# Altium PCB board_pls.PcbDoc
Units mil, origin at the board's own origin, x right, y up, seen from the top; angles counter-clockwise.
Board outline 8000 x 8000 mil, 4 copper layers (LV, GND, LOOP, HV), stack 53.912 mil thick; 78 components, 25 nets, 206 pads, 75 vias.
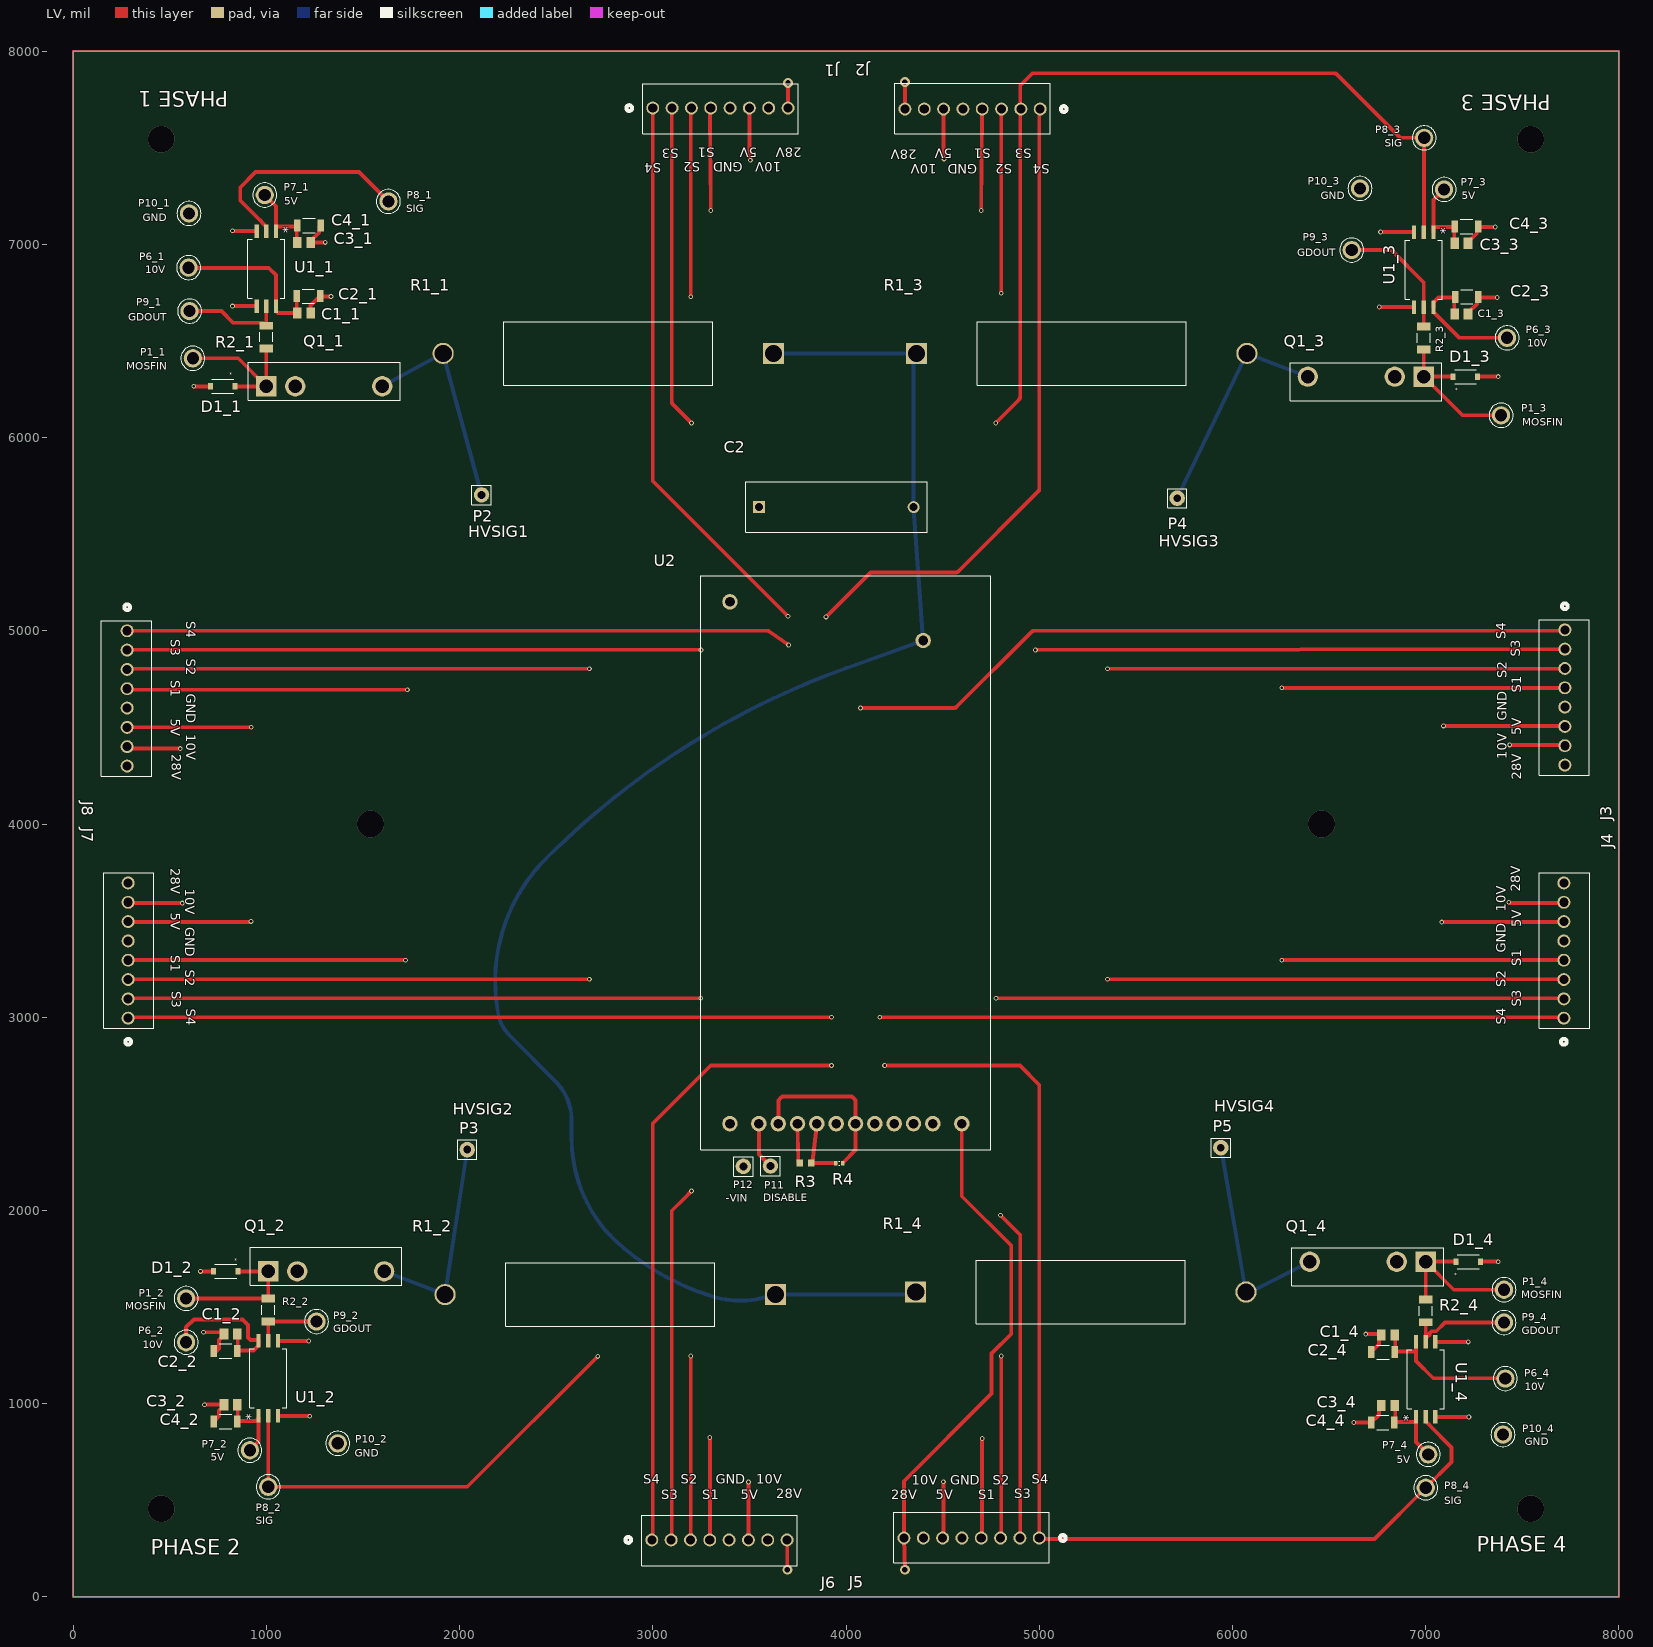
[diagram p0: LV view]
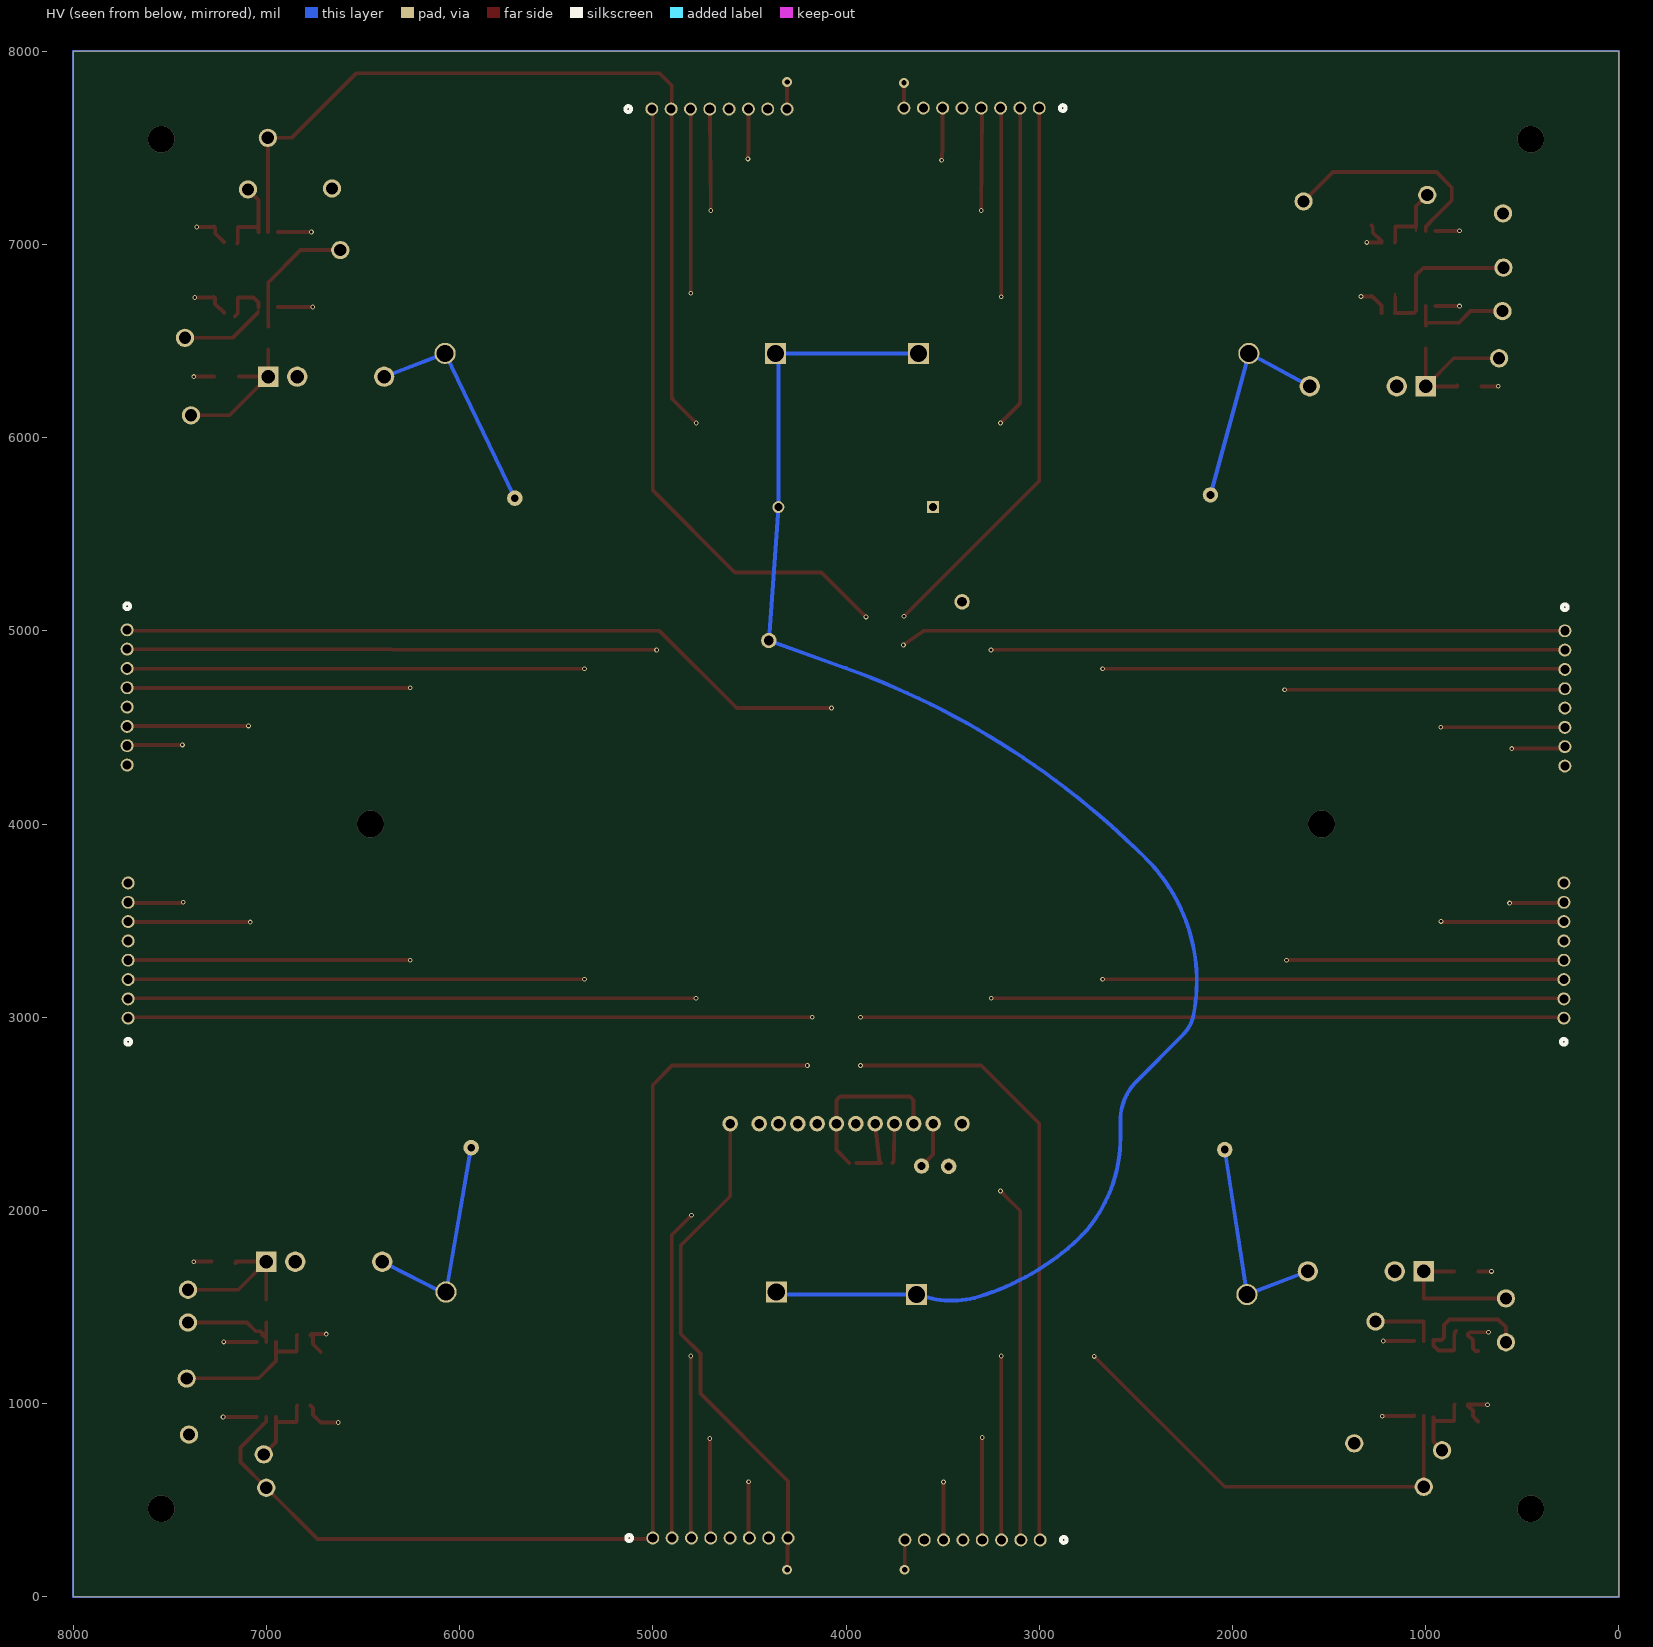
[diagram p1: HV view, seen from below]
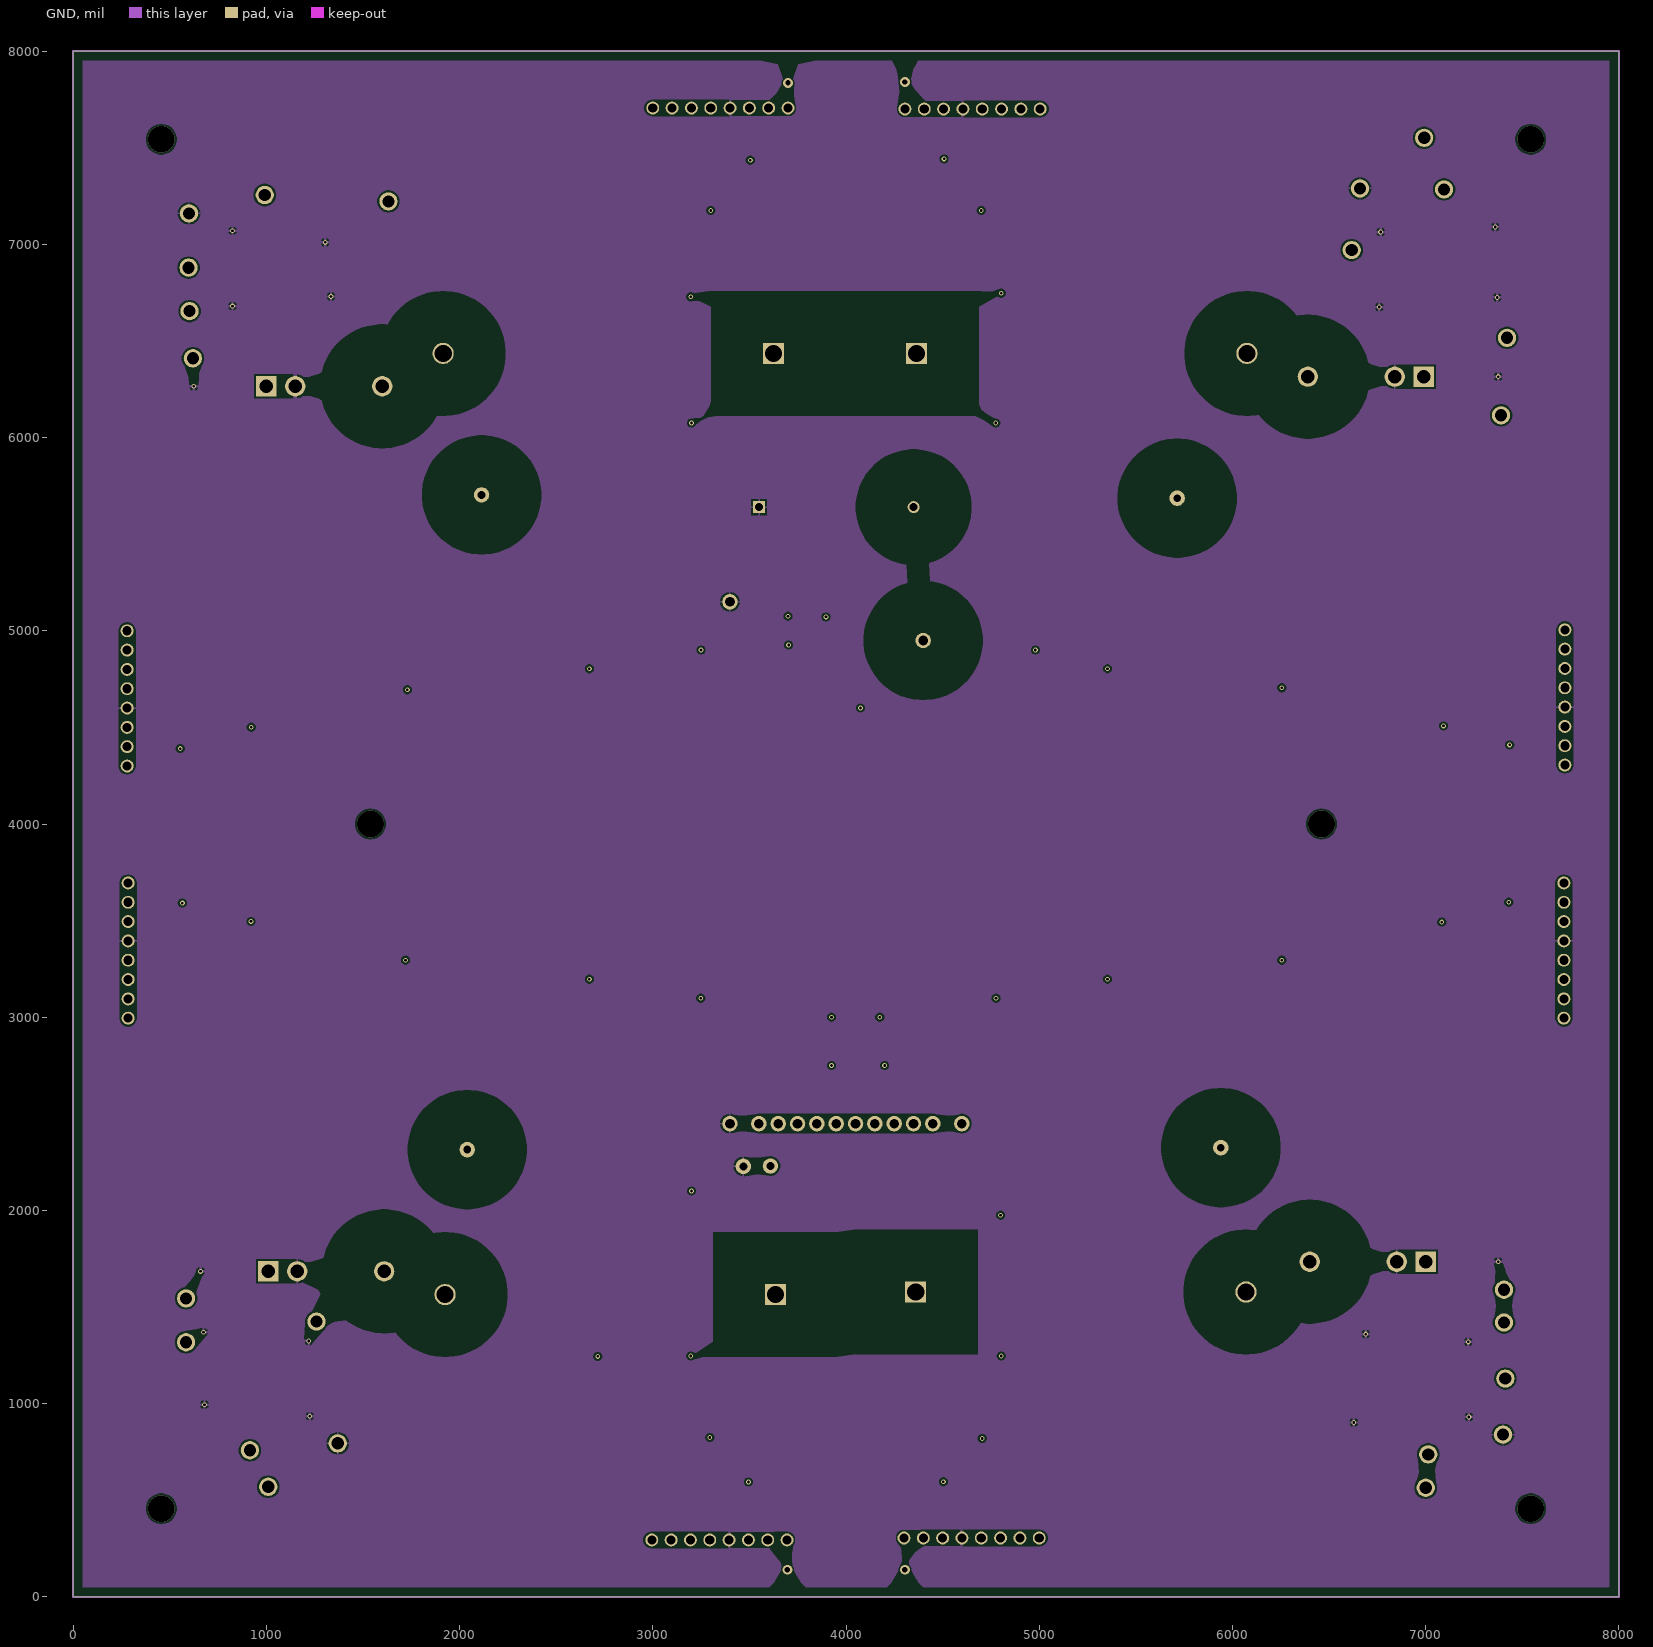
[diagram p2: GND]
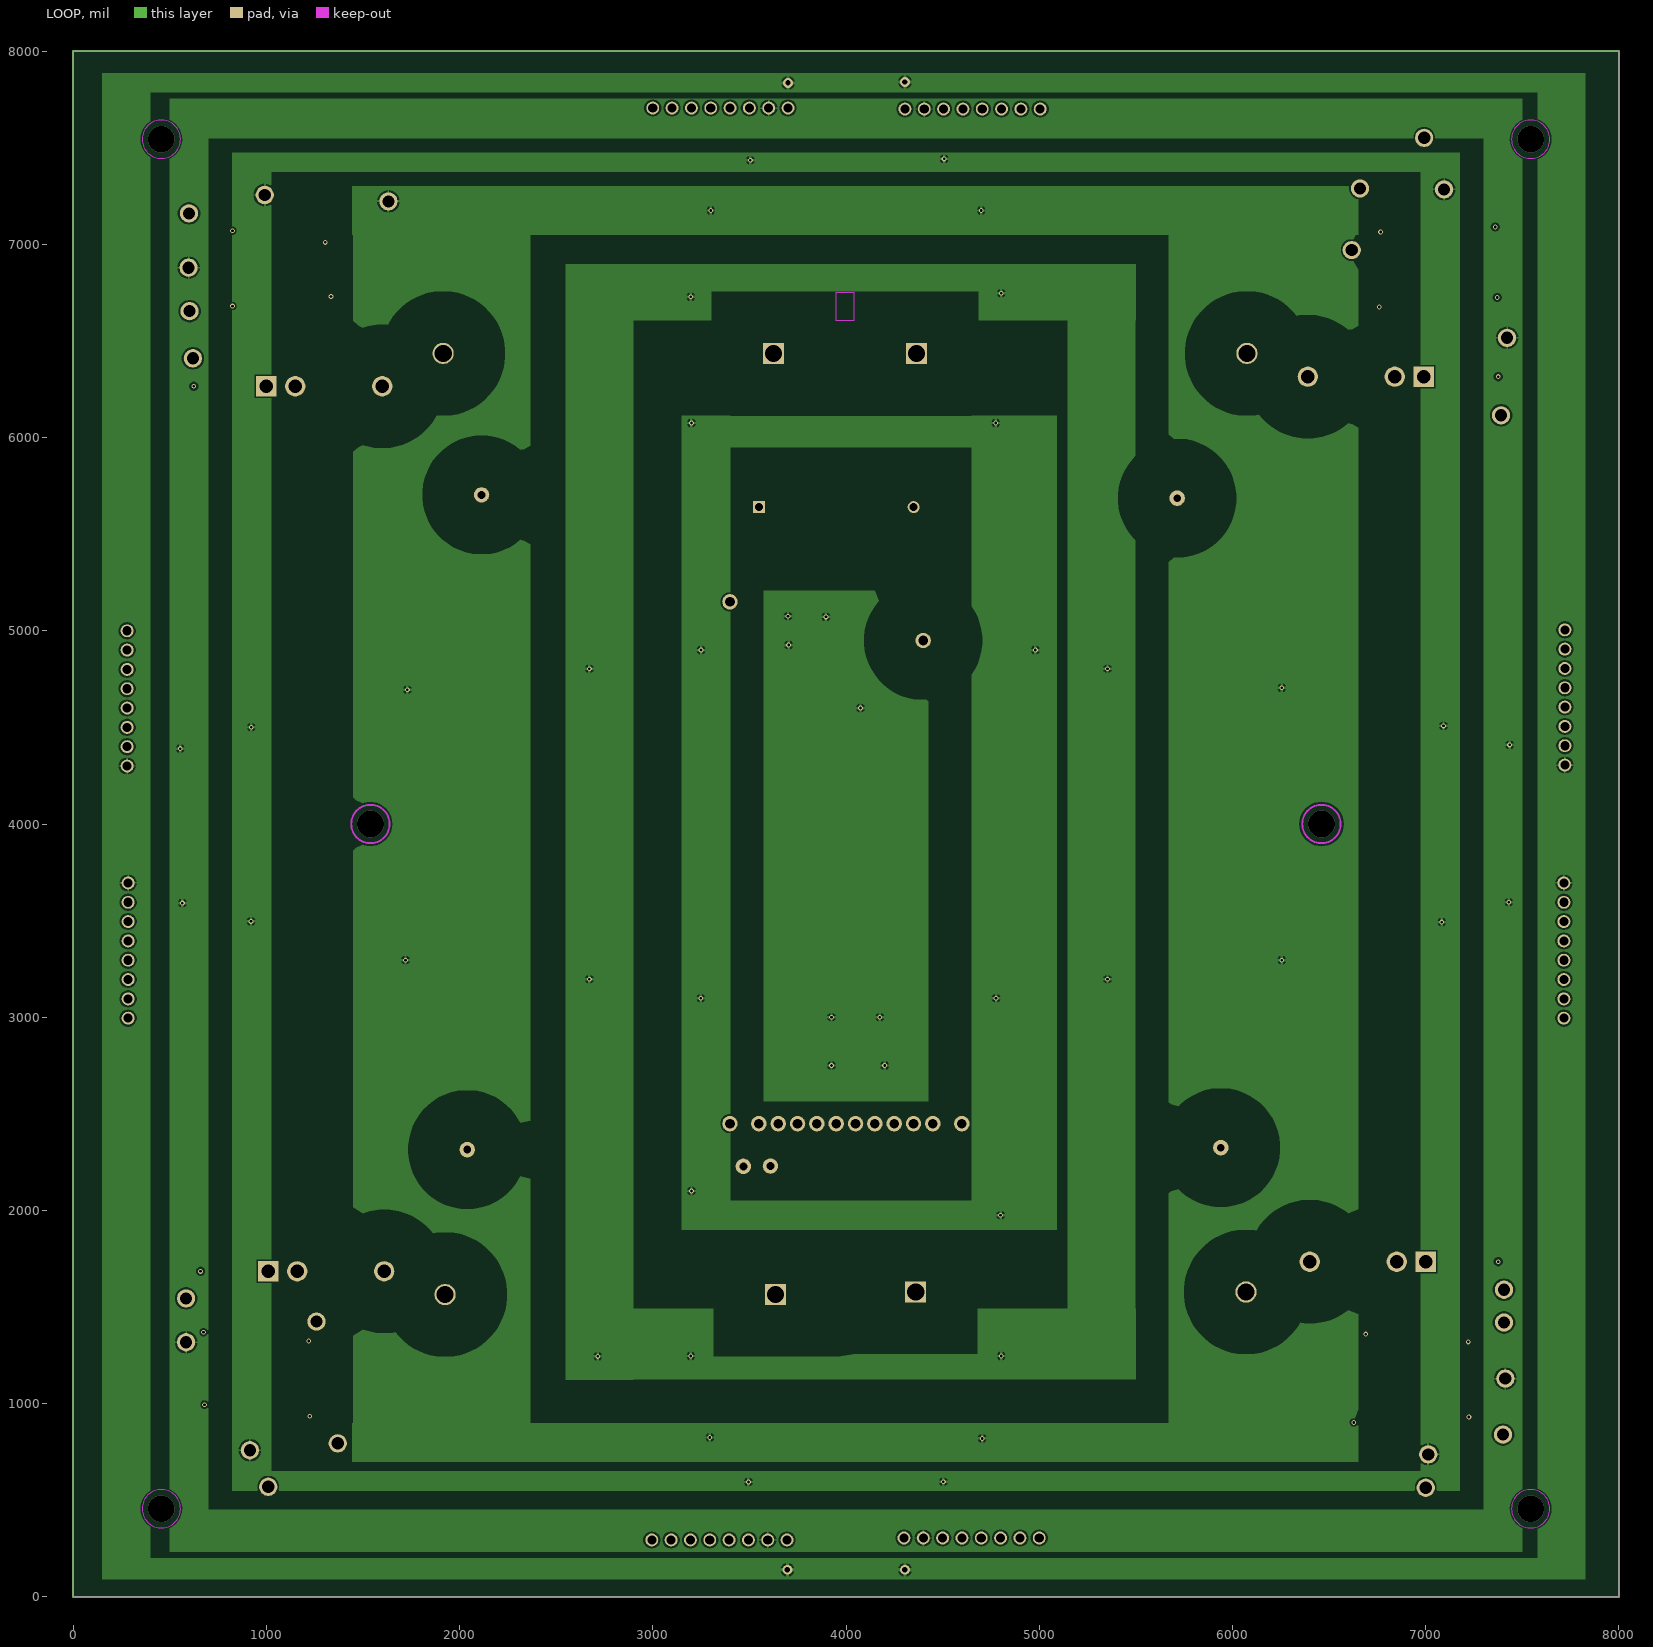
[diagram p3: LOOP]

## Layer stack, top to bottom
Top Solder: solder mask 1, SM-001, Dk 4
LV: signal copper 1.378
Dielectric 1: prepreg 5.1, PP-017, Dk 4.3
Dielectric 2: prepreg 5.1, PP-017, Dk 4.3
GND: signal copper 1.378
Dielectric 3: core 28, Core-039, Dk 4.8
LOOP: signal copper 1.378
Dielectric 4: prepreg 5.1, PP-017, Dk 4.3
Dielectric 5: prepreg 5.1, PP-017, Dk 4.3
HV: signal copper 1.378
Bottom Solder: solder mask 1, SM-001, Dk 4

## Board outline
0,0 0,8000 8000,8000 8000,0

## Design rules (kind name [scope] priority, off if disabled: settings)
Clearance "Schematic Clearance Constraint_4" [InNet('HVSIG3')] p1: gap=267.72 ignorepadtopadclearanceinfootprint=TRUE except(0: Arc-Hole Track-Hole SMDPad-Hole THPad-Hole Via-Hole Fill-Hole Poly-Hole Region-Hole Text-Hole; 10: Arc-Text Track-Text SMDPad-Text THPad-Text Via-Text Fill-Text Poly-Text Region-Text Text-Text; 196.85: Arc-Arc Arc-Track Arc-SMDPad Arc-THPad Arc-Via Track-Track Track-SMDPad Track-THPad Track-Via SMDPad-SMDPad SMDPad-THPad SMDPad-Via THPad-THPad THPad-Via Via-Via)
Clearance "Schematic Clearance Constraint_3" [InNet('HVSIG1')] p2: gap=267.72 ignorepadtopadclearanceinfootprint=TRUE except(0: Arc-Hole Track-Hole SMDPad-Hole THPad-Hole Via-Hole Fill-Hole Poly-Hole Region-Hole Text-Hole; 10: Arc-Text Track-Text SMDPad-Text THPad-Text Via-Text Fill-Text Poly-Text Region-Text Text-Text; 196.85: Arc-Arc Arc-Track Arc-SMDPad Arc-THPad Arc-Via Track-Track Track-SMDPad Track-THPad Track-Via SMDPad-SMDPad SMDPad-THPad SMDPad-Via THPad-THPad THPad-Via Via-Via)
Clearance "Schematic Clearance Constraint_2" [InNet('HVSIG4')] p3: gap=267.72 ignorepadtopadclearanceinfootprint=TRUE except(0: Arc-Hole Track-Hole SMDPad-Hole THPad-Hole Via-Hole Fill-Hole Poly-Hole Region-Hole Text-Hole; 10: Arc-Text Track-Text SMDPad-Text THPad-Text Via-Text Fill-Text Poly-Text Region-Text Text-Text; 196.85: Arc-Arc Arc-Track Arc-SMDPad Arc-THPad Arc-Via Track-Track Track-SMDPad Track-THPad Track-Via SMDPad-SMDPad SMDPad-THPad SMDPad-Via THPad-THPad THPad-Via Via-Via)
Clearance "Schematic Clearance Constraint_1" [InNet('3kV')] p4: gap=267.72 ignorepadtopadclearanceinfootprint=TRUE except(0: Arc-Hole Track-Hole SMDPad-Hole THPad-Hole Via-Hole Fill-Hole Poly-Hole Region-Hole Text-Hole; 10: Arc-Text Track-Text SMDPad-Text THPad-Text Via-Text Fill-Text Poly-Text Region-Text Text-Text; 196.85: Arc-Arc Arc-Track Arc-SMDPad Arc-THPad Arc-Via Track-Track Track-SMDPad Track-THPad Track-Via SMDPad-SMDPad SMDPad-THPad SMDPad-Via THPad-THPad THPad-Via Via-Via)
Clearance "Schematic Clearance Constraint" [InNet('HVSIG2')] p5: gap=267.72 ignorepadtopadclearanceinfootprint=TRUE except(0: Arc-Hole Track-Hole SMDPad-Hole THPad-Hole Via-Hole Fill-Hole Poly-Hole Region-Hole Text-Hole; 10: Arc-Text Track-Text SMDPad-Text THPad-Text Via-Text Fill-Text Poly-Text Region-Text Text-Text; 196.85: Arc-Arc Arc-Track Arc-SMDPad Arc-THPad Arc-Via Track-Track Track-SMDPad Track-THPad Track-Via SMDPad-SMDPad SMDPad-THPad SMDPad-Via THPad-THPad THPad-Via Via-Via)
Clearance [All] p6: gap=10 ignorepadtopadclearanceinfootprint=FALSE except(0: Arc-Hole Track-Hole SMDPad-Hole THPad-Hole Via-Hole Fill-Hole Poly-Hole Region-Hole Text-Hole)
Height [All] p1 off: minheight=0 maxheight=1000 prefheight=500
HoleSize [All] p1 off: absolutevalues=TRUE maxlimit=100 minlimit=1 maxpercent=80.000 minpercent=20.000
PolygonConnect [All] p1: connectstyle=Relief reliefconductorwidth=10 reliefentries=4 polygonreliefangle="90 Angle" airgapwidth=10
RoomDefinition U4_power [InComponentClass('U4_power')] p1: confinementstyle=ConfineIn formatcopy=TRUE lockcomponents=FALSE outline 4175,485 7667,485 7667,1865 4175,1865
RoomDefinition U3_power [InComponentClass('U3_power')] p2: confinementstyle=ConfineIn formatcopy=FALSE lockcomponents=FALSE outline 4175,6025 7656,6025 7656,7636 4175,7636
RoomDefinition top_pls [InComponentClass('top_pls')] p3: confinementstyle=ConfineIn formatcopy=TRUE lockcomponents=FALSE outline 10,2823.64 10,5166.36 2822.46,7970 5172.54,7970 7985,5166.36 7985,2823.64 5172.54,20 2822.46,20
RoomDefinition U1_power [InComponentClass('U1_power')] p4: confinementstyle=ConfineIn formatcopy=TRUE lockcomponents=FALSE outline 3825,7515 515,7515 515,6135 3825,6135
RoomDefinition U2_power [InComponentClass('U2_power')] p5: confinementstyle=ConfineIn formatcopy=FALSE lockcomponents=FALSE outline 3825,1865 485,1865 485,485 3825,485
RoutingVias [All] p1: holewidth=28 width=50 viastyle="Through Hole" minholewidth=28 minwidth=50 maxholewidth=28 maxwidth=50
SolderMaskExpansion [All] p1: expansion=4 istentingtop=FALSE
Width [All] p1 off: maxlimit=10 minlimit=10 preferedwidth=10
28 further rules are at their usual default settings.

## Classes and differential pairs
channel class power_pls: U1_power U2_power U3_power U4_power
component class U4_power: C1_4 C2_4 C3_4 C4_4 D1_4 P1_4 P6_4 P7_4 P8_4 P9_4 P10_4 Q1_4 R1_4 R2_4 U1_4
component class U3_power: C1_3 C2_3 C3_3 C4_3 D1_3 P1_3 P6_3 P7_3 P8_3 P9_3 P10_3 Q1_3 R1_3 R2_3 U1_3
component class U2_power: C1_2 C2_2 C3_2 C4_2 D1_2 P1_2 P6_2 P7_2 P8_2 P9_2 P10_2 Q1_2 R1_2 R2_2 U1_2
component class U1_power: C1_1 C2_1 C3_1 C4_1 D1_1 P1_1 P6_1 P7_1 P8_1 P9_1 P10_1 Q1_1 R1_1 R2_1 U1_1
component class top_pls: C2 J1 J2 J3 J4 J5 J6 J7 J8 P2 P3 P4 P5 P11 P12 R3 R4 U2

## Components (designator, comment, footprint, x,y, rotation, side; value= is the part's Value field where it differs from the comment)
C1_1 "0.1u" "0.1UF CER SMD" 1195,6645 r180 top (schematic designator C1)
C1_2 "0.1u" "0.1UF CER SMD" 815,1360 r0 top (schematic designator C1)
C1_3 "0.1u" "0.1UF CER SMD" 7185,6640 r180 top (schematic designator C1)
C1_4 "0.1u" "0.1UF CER SMD" 6805,1355 r0 top (schematic designator C1)
C2 "27n" "HV CAPACITOR" 3550,5640 r0 top
C2_1 "10u" "10UF CER SMD" 1218,6732 r180 top (schematic designator C2)
C2_2 "10u" "10UF CER SMD" 789,1273 r0 top (schematic designator C2)
C2_3 "10u" "10UF CER SMD" 7212,6728 r180 top (schematic designator C2)
C2_4 "10u" "10UF CER SMD" 6779,1267 r0 top (schematic designator C2)
C3_1 "0.1u" "0.1UF CER SMD" 1195,7010 r180 top (schematic designator C3)
C3_2 "0.1u" "0.1UF CER SMD" 815,995 r0 top (schematic designator C3)
C3_3 "0.1u" "0.1UF CER SMD" 7185,7005 r180 top (schematic designator C3)
C3_4 "0.1u" "0.1UF CER SMD" 6805,990 r0 top (schematic designator C3)
C4_1 "10u" "10UF CER SMD" 1221,7097 r180 top (schematic designator C4)
C4_2 "10u" "10UF CER SMD" 789,908 r0 top (schematic designator C4)
C4_3 "10u" "10UF CER SMD" 7211,7092 r180 top (schematic designator C4)
C4_4 "10u" "10UF CER SMD" 6778,903 r0 top (schematic designator C4)
D1_1 "Zener Diode" "ZENER DIODE" 775,6265 r180 top (schematic designator D1)
D1_2 "Zener Diode" "ZENER DIODE" 790,1685 r180 top (schematic designator D1)
D1_3 "Zener Diode" "ZENER DIODE" 7205,6315 r0 top (schematic designator D1)
D1_4 "Zener Diode" "ZENER DIODE" 7220,1735 r0 top (schematic designator D1)
J1 "207843-0008" "1X8 MOLEX HEADER - FEMALE" 3000,7705 r0 top
J2 "207843-0008" "1X8 MOLEX HEADER - FEMALE" 5005,7700 r180 top
J3 "207843-0008" "1X8 MOLEX HEADER - FEMALE" 7720,5005 r270 top
J4 "207843-0008" "1X8 MOLEX HEADER - FEMALE" 7715,2995 r90 top
J5 "207843-0008" "1X8 MOLEX HEADER - FEMALE" 5000,305 r180 top
J6 "207843-0008" "1X8 MOLEX HEADER - FEMALE" 2995,295 r0 top
J7 "207843-0008" "1X8 MOLEX HEADER - FEMALE" 285,2995 r90 top
J8 "207843-0008" "1X8 MOLEX HEADER - FEMALE" 280,5000 r270 top
P1_1 "MOSFIN" 5013 620,6410 r0 top (schematic designator P1)
P1_2 "MOSFIN" 5013 585,1545 r90 top (schematic designator P1)
P1_3 "MOSFIN" 5013 7390,6115 r90 top (schematic designator P1)
P1_4 "MOSFIN" 5013 7405,1590 r90 top (schematic designator P1)
P2 "HVSIG1" VIA 2114,5703 r0 top
P3 "HVSIG2" VIA 2040,2315 r0 top
P4 "HVSIG3" VIA 5714,5686 r0 top
P5 "HVSIG4" VIA 5940,2325 r0 top
P6_1 "10V" 5013 598,6879 r90 top (schematic designator P6)
P6_2 "10V" 5013 585,1318 r270 top (schematic designator P6)
P6_3 "10V" 5013 7421,6516 r90 top (schematic designator P6)
P6_4 "10V" 5013 7412,1130 r270 top (schematic designator P6)
P7_1 "5V" 5013 992,7255 r90 top (schematic designator P7)
P7_2 "5V" 5013 915,759 r270 top (schematic designator P7)
P7_3 "5V" 5013 7095,7284 r90 top (schematic designator P7)
P7_4 "5V" 5013 7013,738 r270 top (schematic designator P7)
P8_1 "SIG" 5013 1632,7222 r90 top (schematic designator P8)
P8_2 "SIG" 5013 1010,570 r270 top (schematic designator P8)
P8_3 "SIG" 5013 6992,7551 r90 top (schematic designator P8)
P8_4 "SIG" 5013 7000,565 r270 top (schematic designator P8)
P9_1 "GDOUT" 5013 603,6654 r90 top (schematic designator P9)
P9_2 "GDOUT" 5013 1260,1425 r270 top (schematic designator P9)
P9_3 "GDOUT" 5013 6617,6970 r90 top (schematic designator P9)
P9_4 "GDOUT" 5013 7405,1420 r270 top (schematic designator P9)
P10_1 "GND" 5013 600,7160 r90 top (schematic designator P10)
P10_2 "GND" 5013 1370,795 r270 top (schematic designator P10)
P10_3 "GND" 5013 6660,7289 r90 top (schematic designator P10)
P10_4 "GND" 5013 7400,840 r270 top (schematic designator P10)
P11 "DISABLE" Via 3609,2230 r0 top
P12 "-VIN" Via 3469,2228 r0 top
Q1_1 "MOSFET" MOSFET 1000,6265 r0 top (schematic designator Q1)
Q1_2 "MOSFET" MOSFET 1010,1685 r0 top (schematic designator Q1)
Q1_3 "MOSFET" MOSFET 6990,6315 r180 top (schematic designator Q1)
Q1_4 "MOSFET" MOSFET 7000,1735 r180 top (schematic designator Q1)
R1_1 "10M" "10M OHM" 3625,6435 r180 top (schematic designator R1)
R1_2 "10M" "10M OHM" 3635,1565 r180 top (schematic designator R1)
R1_3 "10M" "10M OHM" 4365,6435 r0 top (schematic designator R1)
R1_4 "10M" "10M OHM" 4360,1578 r0 top (schematic designator R1)
R2_1 "4.99" "4.99 OHM" 1000,6520 r90 top (schematic designator R2)
R2_2 "4.99" "4.99 OHM" 1010,1485 r270 top (schematic designator R2)
R2_3 "4.99" "4.99 OHM" 6990,6515 r90 top (schematic designator R2)
R2_4 "4.99" "4.99 OHM" 7000,1480 r270 top (schematic designator R2)
R3 "330" "330 OHM" 3790,2245 r0 top
R4 "180" "180 OHM" 3965,2245 r0 top
U1_1 "Gate Driver" "GATE DRIVER" 1000,6874.13 r270 top (schematic designator U1)
U1_2 "Gate Driver" "GATE DRIVER" 1010,1130.87 r90 top (schematic designator U1)
U1_3 "Gate Driver" "GATE DRIVER" 6990,6869.13 r270 top (schematic designator U1)
U1_4 "Gate Driver" "GATE DRIVER" 7000,1125.87 r90 top (schematic designator U1)
U2 "Step Up Converter" "STEP UP CONVERTER" 4000,3800 r90 top

## Footprints (in the part's own frame and the unit in brackets; to place one, negate y for a bottom-side part, rotate by r counter-clockwise, add the part's x,y. Pads: shape width x height; smd on the part's side, far side on the other; paste and mask are expansions set on the pad)
"0.1UF CER SMD" [mm] "CAPC2012X94N"
  rect 1.16x1.47 smd: 1(-0.88,0) 2(0.88,0)
  body extent -1,-0.63 1,0.63, height 0.94
"1X8 MOLEX HEADER - FEMALE" [mil] "CONN_171856-0008_MOL"
  round 67 hole 47 mask+0: 1(0,0) 2(100,0) 3(200,0) 4(300,0) 5(400,0) 6(500,0) 7(600,0) 8(700,0)
  silkscreen extent -137,-133 752,127, body extent 0,0 10,10, height 10
"4.99 OHM" [mm] "RESC3116X65N"
  rect 1.05x1.77 smd: 1(-1.485,0) 2(1.485,0)
  silkscreen extent -0.64,-0.88 0.64,0.88, body extent -1.6,-0.8 1.6,0.8, height 0.65
"10M OHM" [mil] "OH_MOX910_OHM"
  rect 110x110 hole 90 mask+0: 1(0,0)
  round 110 hole 90 mask+0: 2(1710,0)
  silkscreen extent 315,-165 1395,165, body extent 0,0 10,10, height 10
"10UF CER SMD" [mm] "CAP_CL31_SAM"
  rect 0.856x1.6 smd paste+0 mask+0: 1(-1.528,0) 2(1.528,0)
  silkscreen extent -0.79,-0.93 0.79,0.93, body extent 0,0 0.25,0.25, height 0.25
"180 OHM" [mm] "RESC1005X40N"
  rect 0.5x0.6 smd: 1(-0.455,0) 2(0.455,0)
  silkscreen extent -0.05,-0.25 0.05,0.25
"330 OHM" [mm] "RESC1508X55N"
  rect 0.87x0.93 smd: 1(-0.755,0) 2(0.755,0)
5013 [mm] "TESTPOINT_5013"
  round 2.4 hole 1.6: 1(0,0)
  silkscreen extent -1.59,-1.58 1.59,1.58
"GATE DRIVER" [mil] "ADuM4120"
  rect 69.53x22.08 smd paste+0 mask+0: 1(-194.13,50) 2(-194.13,0) 3(-194.13,-50) 4(194.13,-50) 5(194.13,0) 6(194.13,50)
  silkscreen extent -153,-95 153,95, body extent 0,0 10,10, height 10
"HV CAPACITOR" [mil] "SV17_AVX"
  rect 62x62 hole 42 mask+0: 1(0,0)
  round 62 hole 42 mask+0: 2(800,0)
  silkscreen extent -70,-130 870,130, body extent 0,0 10,10, height 10
MOSFET [mm]
  rect 2.67x2.67 hole 1.78: 1(0,0)
  round 2.67 hole 1.78: 2(3.81,0) 3(15.24,0)
  silkscreen extent -2.34,-1.85 17.58,3.17, body extent -2.34,-1.85 17.58,3.17, height 26.52
"STEP UP CONVERTER" [mil] "HRL30"
  round 80 hole 50: 1(-1350.43,600.7) 2(-1350.43,450.7) 3(-1350.43,350.7) 4(-1350.43,250.7) 5(-1350.43,150.7) 6(-1350.43,50.7) 7(-1350.43,-49.3) 8(-1350.43,-149.3) 9(-1350.43,-249.3) 10(-1350.43,-349.3) 11(-1350.43,-449.3) 12(-1350.43,-599.3) 13(1149.57,-399.3) 14(1349.57,600.7)
  silkscreen extent -1485,-749 1485,751
VIA [mil]
  round 80 hole 40: 1(0,0)
  silkscreen extent -50,-50 50,50
Via [mil]
  round 80 hole 40: 1(0,0)
  silkscreen extent -50,-50 50,50
"ZENER DIODE" [mil] "KDZVTR16B"
  rect 26x35 smd paste+0 mask+0: 1(-64,0) 2(64,0)
  silkscreen extent -56,-37 56,37, body extent 0,0 10,10, height 10

## Part data
C1_1 C1_2 C1_3 C1_4 C2 C2_1 C2_2 C2_3 C2_4 C3_1 C3_2 C3_3 C3_4 C4_1 C4_2 C4_3 C4_4: library part Capacitor
D1_1 D1_2 D1_3 D1_4: "KDZVTR16B", Built_By=EMA_Matt, Copyright="Copyright (C) 2018 Accelerated Designs. All rights reserved", Manufacturer_Part_Number=KDZVTR16B, RefDes=RefDes, SourceLibrary=Rohm_2019-09-23, Type=DEV, Vendor="ROHM Semiconductor"
J1 J2 J3 J4 J5 J6 J7 J8: "1x8 Header", Manufacturer_Name=Molex, Mouser Part Number=538-207843-0008, Datasheet Link=https://www.molex.com/pdm_docs/sd/2078430008_sd.pdf, Height=6.95mm, Manufacturer_Part_Number=207843-0008, Mouser Price/Stock=https://www.mouser.co.uk/ProductDetail/Molex/207843-0008?qs=XeJtXLiO41QJV3n1oae5pg%3D%3D
P1_1 P1_2 P1_3 P1_4 P2 P3 P4 P5 P6_1 P6_2 P6_3 P6_4 P7_1 P7_2 P7_3 P7_4 P8_1 P8_2 P8_3 P8_4 P9_1 P9_2 P9_3 P9_4 P10_1 P10_2 P10_3 P10_4 P11 P12: library part "Output Point", "Thru hole via"
Q1_1 Q1_2 Q1_3 Q1_4: "IXTL2N4X0"
R1_1 R1_2 R1_3 R1_4 R2_1 R2_2 R2_3 R2_4 R3 R4: library part Resistor
U1_1 U1_2 U1_3 U1_4: "ADuM4120"
U2: "HRL30"

## Via types
v1: diameter 25, hole 14, LV to HV, tented both sides, 65 vias
v2: diameter 137.8, hole 137.8, LV to HV, 6 vias
v3: diameter 50, hole 28, LV to HV, tented both sides, 4 vias

## Nets (pads, with @x,y where several pads share a name; then routed paths per layer and width w, separated by ;. In a path a pad name is that pad's centre, name@x,y a point inside that pad or via, vN(x,y) a via of type N, cw(c..) or ccw(c..) an arc to the next point about the centre after c; other vN are vias at no path point)
3kV: C2.2 R1_1.1 R1_2.1 R1_3.1 R1_4.1 U2.13 | length 8411.2
  HV w20: R1_1.1 R1_3.1 4350,6390 C2.2 U2.13 4000.91,4806.46 ccw(c5422.81,847.9) 2449.09,3822.62 ccw(c3086.08,3184.67) 2200.54,3015.66 ccw(c2406.15,3054.87) 2258.22,2906.78 2494.89,2670.11 cw(c2289.79,2464.79) 2580,2464.79 2580,2375.03 ccw(c3317.4,2374.97) 2795.41,1854.12 ccw(c3698.52,2815.21) 3314.31,1553.59 3314.38,1553.57 ccw(c3453.03,2015.22) 3576.34,1549.24 3584.9,1551.54 cw(c3590,1532.2) 3590,1552.2 R1_2.1 R1_4.1@4375,1565
5V_OUT_1: C3_1.2 C3_2.2 C3_3.2 C3_4.2 C4_1.2 C4_2.2 C4_3.2 C4_4.2 J1.6 J2.6 J3.6 J4.6 J5.6 J6.6 J7.6 J8.6 P7_1.1 P7_2.1 P7_3.1 P7_4.1 U1_1.1 U1_2.1 U1_3.1 U1_4.1 | length 5279.7
  LV w10: U1_2.1@960,929.94 U1_2.1 ; U1_1.1 U1_1.1@1050,7091.33
  LV w20: J8.6 280.5,4500.5 921.5,4500.5 v1(922,4501) ; J7.6@300,3492.13 v1@917.13,3492.13 ; C3_2.2 852.19,992.46 852.19,912.54 854.72,910 940.06,910 ccw(c940,930) 960,929.94 960,804 P7_2.1 ; P7_1.1 1050,7197 1050,7091.33 1051.04,7092.37 1074.11,7092.37 1074.21,7092.46 1157.82,7092.46 1157.82,7012.54 C3_1.2 ; v1(3495,595) 3495,316.71 3499.69,312.02 J6.6@3500,312.02 ; J1.6 3500,7487.5 ccw(c3520,7487.5) 3500.09,7485.57 v1(3505,7435) ; J5.6@4503.94,311.85 v1(4503.94,596.06) ; J2.6@4505,7710 J2.6 4505,7494.63 ccw(c4525,7494.63) 4505.03,7493.52 v1(4507.87,7442.13) ; C3_4.2 6842.18,987.46 6842.18,907.54 6844.72,905 U1_4.1@6946.98,905 ; U1_4.1 6950,801 P7_4.1 ; U1_3.1 7040,7084 U1_3.1@7041.04,7085.04 ; v1(7082.87,3492.13) J4.6@7700,3492.13 ; v1(7092.13,4507.87) J3.6@7700,4507.87 ; P7_3.1 7041.04,7230.04 U1_3.1@7041.04,7085.04 ; C3_3.2 7147.81,7007.54 7147.81,7087.46 7145.28,7090 7046,7090 U1_3.1@7041.04,7085.04
  LOOP w10: v1@917.13,3492.13 v1(921.06,3496.06) v1@925,3500 ; J6.6@3492.13,300 3497.07,304.94 ccw(c3490,312.02) J6.6@3500,312.02
  LOOP w20: J5.6@4503.94,311.85 ccw(c4523.94,311.92) J5.6@4507.87,300
10V_OUT_1: C1_1.2 C1_2.2 C1_3.2 C1_4.2 C2_1.2 C2_2.2 C2_3.2 C2_4.2 J1.7 J2.7 J3.7 J4.7 J5.7 J6.7 J7.7 J8.7 P6_1.1 P6_2.1 P6_3.1 P6_4.1 U1_1.6 U1_2.6 U1_3.6 U1_4.6 | length 4256.7
  LV w10: C2_1.2@1157.82,6727.46 C2_1.2@1157.82,6746.69 ; U1_3.6 7040,6651.28 U1_3.6@7046.04,6645.24
  LV w20: J8.7 284.14,4395.86 ccw(c298.25,4410.04) 298.24,4390.04 v1(555,4390) ; J7.7@300,3590.55 v1(565.55,3590.55) ; P6_2.1 585,1396 625,1436 877,1436 906,1407 906,1341.72 917.72,1330 958.96,1330 960,1328.96 U1_2.6 960,1301.28 933.72,1275 854.72,1275 852.19,1277.54 852.19,1357.46 C1_2.2 849.65,1362.48 849.65,1362.54 ccw(c829.65,1362.48) C1_2.2@843.82,1376.59 ; P6_1.1 599,6878 1013,6878 1050,6841 U1_1.6 1050,6656.28 1061.28,6645 C1_1.2 1157.82,6647.54 C2_1.2@1157.82,6727.46 ; C1_4.2 6842.18,1352.46 6842.18,1272.54 6844.72,1270 6950,1270 ; U1_4.6 6950,1270 ; U1_3.6 7040,6698.72 7066.28,6725 7145.28,6725 7147.81,6722.46 7147.81,6642.54 C1_3.2 C1_3.2@7163.19,6627.17 ; U1_3.6@7046.04,6645.24 7175.28,6516 P6_3.1 ; P6_4.1 7410,1132 7039,1132 6950,1221 6950,1270 ; v1@7434.45,3590.55 J4.7@7700,3590.55 ; v1(7434.45,4409.45) J3.7@7700,4409.45
  LOOP w10: v1@7425,3600 v1(7429.72,3595.28) v1@7434.45,3590.55
28V_OUT_1: J1.8 J2.8 J3.8 J4.8 J5.8 J6.8 J7.8 J8.8 U2.12 | length 3061.3
  LV w20: J6.8 3696,294 3696,141 v3(3697,140) ; J1.8 3700,7770 v3(3700,7835) ; v3(4305,140) 4302.5,222.5 J5.8 4300,599 4753,1052 4753,1259 4855,1361 4855,1818 4599.3,2073.7 U2.12 ; J2.8@4305,7710 4305,7775 v3(4305,7840)
GND: C1_1.1 C1_2.1 C1_3.1 C1_4.1 C2.1 C2_1.1 C2_2.1 C2_3.1 C2_4.1 C3_1.1 C3_2.1 C3_3.1 C3_4.1 C4_1.1 C4_2.1 C4_3.1 C4_4.1 D1_1.2 D1_2.2 D1_3.2 D1_4.2 J1.5 J2.5 J3.5 J4.5 J5.5 J6.5 J7.5 J8.5 P10_1.1 P10_2.1 P10_3.1 P10_4.1 P12.1 Q1_1.2 Q1_2.2 Q1_3.2 Q1_4.2 U1_1.3 U1_1.4 U1_2.3 U1_2.4 U1_3.3 U1_3.4 U1_4.3 U1_4.4 U2.1 U2.14 | length 3233.9
  LV w10: C3_1.1 C3_1.1@1229.65,7016.1 ; C2_1.1@1268.41,6714.41 1270.26,6722.23 1271.46,6727.35 1273.47,6729.36 1276.4,6732.29 1278.15,6732.29 C2_1.1 C2_1.1@1280.15,6730 ; C1_3.1 C1_3.1@7219.65,6646.1 ; C3_3.1 C3_3.1@7219.65,7011.1 ; C4_3.1 C4_3.1@7273.15,7090 ; C2_3.1 C2_3.1@7275.15,6725
  LV w20: v1(625,6265) D1_1.2 ; v1(660,1685) D1_2.2 ; v1(675,1370) 770.35,1370 C1_2.1 780.35,1353.9 755.94,1329.49 755.94,1285.67 743.28,1273 C2_2.1 ; v1(680,995) C3_2.1 780.35,988.9 755.94,964.49 755.94,935.09 C4_2.1 ; v1(825,6680) U1_1.4 ; v1(825,7070) 826.75,7068.25 U1_1.3 ; U1_2.4 v1(1220,1325) ; U1_2.3@1061.04,940 U1_2.3 1223.25,936.75 v1(1225,935) ; C1_1.1 1229.65,6683.5 1268.38,6722.23 1270.26,6722.23 1271.31,6722.23 C2_1.1 ; C3_1.1 v1(1305,7010) ; C3_1.1@1229.65,7016.1 1274.31,7060.76 1274.31,7090.16 C4_1.1 ; C2_1.1@1280.15,6730 v1(1335,6730) ; v1(6628,903) C4_4.1 ; v1(6690,1360) 6765.35,1360 C1_4.1 6757.52,1342.17 6757.52,1307.4 C2_4.1@6717.98,1267.87 ; C4_4.1@6717.98,902.87 6757.52,942.4 6757.52,977.17 C3_4.1 ; v1(6760,6675) U1_3.4 ; v1@6765,7065 v1(6766.75,7063.25) U1_3.3 ; U1_4.3 v1(7223.25,931.75) v1@7225,930 ; U1_4.4 v1(7220,1320) ; C1_3.1@7219.65,6646.1 7265.31,6691.76 7265.31,6721.16 C2_3.1 ; C3_3.1@7219.65,7011.1 7264.31,7055.76 7264.31,7085.16 C4_3.1 ; D1_3.2 v1(7375,6315) ; C4_3.1@7273.15,7090 v1(7360,7090) ; C2_3.1@7275.15,6725 v1(7370,6725) ; D1_4.2 v1(7375,1735)
HVSIG1: P2.1 Q1_1.3 R1_1.2 | length 1116.5
  HV w20: Q1_1.3 R1_1.2 P2.1
HVSIG2: P3.1 Q1_2.3 R1_2.2 | length 1095.8
  HV w20: Q1_2.3 R1_2.2 P3.1
HVSIG3: P4.1 Q1_3.3 R1_3.2 | length 1168.5
  HV w20: P4.1 R1_3.2 Q1_3.3
HVSIG4: P5.1 Q1_4.3 R1_4.2 | length 1140.1
  HV w20: P5.1 6071,1566 Q1_4.3
NetD1_1_1: D1_1.1 P1_1.1 Q1_1.1 R2_1.1 | length 802.1
  LV w20: P1_1.1 855,6410 Q1_1.1 ; D1_1.1@839,6269.5 D1_1.1 Q1_1.1 ; R2_1.1 Q1_1.1
NetD1_2_1: D1_2.1 P1_2.1 Q1_2.1 R2_2.1 | length 723.2
  LV w20: P1_2.1 585.77,1544.23 1009.23,1544.23 R2_2.1 Q1_2.1 D1_2.1
NetD1_3_1: D1_3.1 P1_3.1 Q1_3.1 R2_3.1 | length 775.4
  LV w20: R2_3.1 Q1_3.1 ; D1_3.1 Q1_3.1 ; P1_3.1 7190,6115 Q1_3.1
NetD1_4_1: D1_4.1 P1_4.1 Q1_4.1 R2_4.1 | length 826.3
  LV w20: R2_4.1 Q1_4.1 ; D1_4.1@7159,1727.5 7156,1730.5 D1_4.1 Q1_4.1 ; P1_4.1 7145,1590 Q1_4.1
NetP9_1_1: P9_1.1 R2_1.2 U1_1.5 | length 530.9
  LV w10: R2_1.2@984.33,6594.13 R2_1.2@999.23,6579.23
  LV w20: P9_1.1@603.77,6653.23 P9_1.1 768.08,6654 827.94,6594.13 R2_1.2@984.33,6594.13 ; R2_1.2@999.23,6579.23 R2_1.2 U1_1.5
NetP9_2_1: P9_2.1 R2_2.2 U1_2.5 | length 352.2
  LV w20: U1_2.5 R2_2.2 1010.77,1425.77 1259.23,1425.77 P9_2.1
NetP9_3_1: P9_3.1 R2_3.2 U1_3.5 | length 673.9
  LV w20: P9_3.1@6617.77,6969.23 P9_3.1 6718.72,6970 6823,6970 6990,6803 U1_3.5 R2_3.2 R2_3.2@6989.23,6574.23
NetP9_4_1: P9_4.1 R2_4.2 U1_4.5 | length 565.7
  LV w10: U1_4.5 U1_4.5@7000,1343.72
  LV w20: U1_4.5 U1_4.5@7000,1343.72 ; R2_4.2 U1_4.5@7000,1343.72 ; P9_4.1 7100,1420 7054.76,1374.76 7030.68,1374.76 7018.96,1363.05 7018.96,1356.48 7007.24,1344.76 7001.04,1344.76 U1_4.5@7000,1343.72
NetP11_1: P11.1 U2.2 | length 244.3
  LV w20: U2.2 3549.3,2289.7 P11.1
NetR3_1: R3.1 U2.4 | length 207.2
  LV w20: U2.4 3753.15,2253.31 R3.1
NetR3_2: R3.2 R4.1 U2.5 | length 335.8
  LV w20: U2.5 3826.85,2253.31 R3.2 R4.1
NetR4_2: R4.2 U2.3 U2.7 | length 886.9
  LV w20: U2.3 3650,2450.27 3650,2570 3664.14,2584.14 cw(c3678.28,2570) 3678.28,2590 4021.72,2590 cw(c4021.72,2570) 4035.83,2584.17 4043.47,2576.53 cw(c4029.3,2562.42) 4049.3,2562.42 U2.7 4049.3,2313.04 3982.91,2246.65 R4.2
SIG1_OUT_1: J1.4 J2.4 J3.4 J4.4 J5.4 J6.4 J7.4 J8.4 P8_1.1 U1_1.2 | length 8992.6
  LV w20: J8.4@288.72,4695 v1(1730,4695) ; J7.4@300,3295.28 v1(1720.28,3295.28) ; U1_1.2 1000,7091.98 998.96,7093.02 998.72,7093.02 981.04,7110.69 981.04,7111.3 969.32,7123.02 968.72,7123.02 865,7226.73 865,7294 944.85,7373.85 1480.15,7373.85 P8_1.1 ; J6.4@3295.28,300 v1(3295.28,825) ; J1.4@3295.28,7700 v1(3300,7175) ; v1(4700,7175) J2.4@4704.72,7700 ; J5.4@4704.72,300 v1(4704.72,820.28) ; v1(6254.72,3295.28) J4.4@7700,3295.28 ; v1(6254.72,4704.72) J3.4@7700,4704.72
SIG2_OUT_1: J1.3 J2.3 J3.3 J4.3 J5.3 J6.3 J7.3 J8.3 P8_2.1 U1_2.2 | length 15607.4
  LV w20: J7.3@300,3196.85 v1(2671.85,3196.85) ; J8.3@300,4803.15 v1(2671.85,4803.15) ; U1_2.2 P8_2.1 2040,570 v1(2715,1245) ; J6.3@3196.85,300 v1(3196.85,1246.85) ; v1(3196.85,6728.15) J1.3@3196.85,7700 ; J5.3@4803.15,300 v1(4803.15,1246.85) ; v1(4803.15,6746.85) J2.3@4803.15,7700 ; v1(5353.15,3196.85) J4.3@7700,3196.85 ; v1(5353.15,4803.15) J3.3@7700,4803.15
SIG3_OUT_1: J1.2 J2.2 J3.2 J4.2 J5.2 J6.2 J7.2 J8.2 P8_3.1 U1_3.2 | length 21353.9
  LV w10: U1_3.2 U1_3.2@6991,7064.25 ; P8_3.1@6991,7550 P8_3.1
  LV w20: J7.2@300,3098.43 v1(3248.43,3098.43) ; J8.2@300,4901.57 v1@3248.43,4901.57 ; J6.2@3098.43,300 3098.43,1998.43 3163.33,2063.33 ccw(c3149.23,2077.51) 3163.43,2063.43 v1(3200.31,2100.6) ; J1.2@3098.43,7700 3098.43,6184.86 ccw(c3118.43,6184.86) 3104.32,6170.68 v1(3200,6075) ; v1(4775,6075) 4893.74,6194.93 cw(c4908,6180.9) 4894.79,6195.91 ccw(c4881.57,6210.93) 4901.57,6210.93 4901.57,7821.57 4965,7885 6526.72,7885 cw(c6526.72,7865) 6540.86,7879.14 6869,7551 P8_3.1 ; v1(4776.57,3098.43) J4.2@7700,3098.43 ; v1(4800,1975) 4901.57,1873.43 J5.2@4901.57,300 ; v1(4980,4900) J3.2 J3.2@7700,4901.57 ; U1_3.2@6991,7064.25 P8_3.1@6991,7550
  GND w20: v1(3248.43,3098.43) v1@3250,3100 ; v1@3248.43,4901.57 v1(3250,4900) ; v1@4775,3100 v1(4776.57,3098.43)
SIG4_OUT_1: J1.1 J2.1 J3.1 J4.1 J5.1 J6.1 J7.1 J8.1 P8_4.1 U1_4.2 | length 29604.6
  LV w20: J7.1@300,3000 v1(3925,3000) ; J8.1@300,5000 3591.54,5000 cw(c3591.54,4980) 3603.04,4996.36 v1(3703.13,4926) ; J6.1@3000,300 3000,2450 3300,2750 v1(3925,2750) ; J1.1@3000,7700 3000,5775 v1(3700,5075) ; v1(3896,5072) 3897,5072 4121.14,5296.14 cw(c4135.28,5282) 4135.28,5302 4567.72,5302 ccw(c4567.72,5322) 4581.83,5307.83 4994.2,5720.2 ccw(c4980,5734.28) 5000,5734.28 J2.1@5000,7700 ; v1(4075,4600) 4556.72,4600 ccw(c4556.72,4620) 4570.83,4605.83 4959.18,4994.18 cw(c4973.28,4980) 4973.22,5000 4973.28,5000 J3.1@7700,5000 ; v1(4175,3000) J4.1@7700,3000 ; v1(4200,2750) 4900,2750 5000,2650 J5.1 5000,300 6735,300 P8_4.1 7134,699 7134,773.66 7018.96,888.7 7018.96,889.06 7000,908.02 U1_4.2
pads on no net: U2.6 U2.8 U2.9 U2.10 U2.11
copper on no net:
  other v2: 456.69,456.69 7543.31,456.69 1539,4000 6460.63,4000 456.69,7543.31 7543.31,7543.31

## Polygon pours and split planes (outlines as drawn)
5V_OUT_1 on LOOP "5V_OUT_1_L03_P030" (solid, pour order 30): 825,7475 825,550 1025,550 1025,7475
SIG4_OUT_1 on LOOP "SIG4_OUT_1_L03_P019" (solid, pour order 19): 3575,5206 4425,5206 4425,2564 3575,2564
SIG2_OUT_1 on LOOP "SIG2_OUT_1_L03_P012" (solid, pour order 12): 2550,6607 5500,6607 5500,6898 2550,6898
SIG1_OUT_1 on LOOP "SIG1_OUT_1_L03_P007" (solid, pour order 7): 1450,7245.73 1450,700 2365,700 2365,7245.73
10V_OUT_1 on LOOP "10V_OUT_1_L03_P029" (solid, pour order 29): 7500,7754 500,7754 500,7550 7500,7550
10V_OUT_1 on LOOP "10V_OUT_1_L03_P025" (solid, pour order 25): 500,7575 500,425 700,425 700,7575
28V_OUT_1 on LOOP "28V_OUT_1_L03_P021" (solid, pour order 21): 150,7825 150,150 400,150 400,7825
5V_OUT_1 on LOOP "5V_OUT_1_L03_P031" (solid, pour order 31): 7175,650 825,650 825,550 7175,550
SIG1_OUT_1 on LOOP "SIG1_OUT_1_L03_P009" (solid, pour order 9): 6650,7300 1445.73,7300 1445.73,7050 6650,7050
10V_OUT_1 on LOOP "10V_OUT_1_L03_P027" (solid, pour order 27): 7300,7575 7300,425 7500,425 7500,7575
5V_OUT_1 on LOOP "5V_OUT_1_L03_P032" (solid, pour order 32): 6975,7475 6975,550 7175,550 7175,7475
10V_OUT_1 on LOOP "10V_OUT_1_L03_P026" (solid, pour order 26): 7500,450 500,450 500,233 7500,233
28V_OUT_1 on LOOP "28V_OUT_1_L03_P023" (solid, pour order 23): 7579.08,7825 7579.08,154.95 7825,154.95 7825,7825
28V_OUT_1 on LOOP "28V_OUT_1_L03_P024" (solid, pour order 24): 150,91 7825,91 7825,201 150,201
28V_OUT_1 on LOOP "28V_OUT_1_L03_P022" (solid, pour order 22): 150,7786 7825,7786 7825,7884 150,7884
SIG2_OUT_1 on LOOP "SIG2_OUT_1_L03_P014" (solid, pour order 14): 2550,1126.17 5500,1126.17 5500,1492 2550,1492
SIG2_OUT_1 on LOOP "SIG2_OUT_1_L03_P013" (solid, pour order 13): 5147.66,6807.48 5147.66,1257.48 5497.66,1257.48 5497.66,6807.48
SIG2_OUT_1 on LOOP "SIG2_OUT_1_L03_P011" (solid, pour order 11): 2550,6650 2550,1125 2900,1125 2900,6650
SIG1_OUT_1 on LOOP "SIG1_OUT_1_L03_P008" (solid, pour order 8): 5670,7245.73 5670,700 6650,700 6650,7245.73
SIG3_OUT_1 on LOOP "SIG3_OUT_1_L03_P015" (solid, pour order 15): 3150,6112 3150,1901 3400,1901 3400,6112
SIG1_OUT_1 on LOOP "SIG1_OUT_1_L03_P010" (solid, pour order 10): 6650,900 1445.73,900 1445.73,700 6650,700
5V_OUT_1 on LOOP "5V_OUT_1_L03_P033" (solid, pour order 33): 825,7375 7175,7375 7175,7475 825,7475
SIG3_OUT_1 on LOOP "SIG3_OUT_1_L03_P017" (solid, pour order 17): 4650,6112 4650,1901 5090,1901 5090,6112
SIG3_OUT_1 on LOOP "SIG3_OUT_1_L03_P016" (solid, pour order 16): 4900,2050 3150,2050 3150,1900 4900,1900
SIG3_OUT_1 on LOOP "SIG3_OUT_1_L03_P018" (solid, pour order 18): 4900,6110 3150,6110 3150,5950 4900,5950
GND on GND "GND_L02_P037" (solid, pour order 37): 50,7950 7950,7950 7950,45 7945,50 50,50

## Keep-outs
LOOP:
  circle w10: c6460.63,4000 r99.47
  circle w0: c6460.63,4000 r99.47
  circle w10: c1539,4000 r99.47
  circle w0: c7543.31,7543.31 r99.47
  circle w0: c7543.31,456.69 r99.47
  circle w0: c456.69,456.69 r99.47
  circle w0: c456.69,7543.31 r99.47
  rectangle: 3947.72,6607 4042.28,6748

## Other copper
Multi-Layer:
  the board outline again, w10

## Silkscreen, mask and mechanical layers (free items; w line width, h text height)
Top Overlay:
  text "PHASE 1" at 802,7793 h80 r180
  text "PHASE 3" at 7647,7773 h80 r180
  text "S1" at 3320,7500 h50 r180
  text "5V" at 3540,7500 h50 r180
  text "28V" at 3770,7500 h50 r180
  text "S3" at 3135,7495 h50 r180
  text "5V" at 4550,7495 h50 r180
  text "S1" at 4750,7495 h50 r180
  text "S3" at 4960,7495 h50 r180
  text "28V" at 4365,7490 h50 r180
  text "S2" at 3245,7425 h50 r180
  text "GND" at 3465,7425 h50 r180
  text "10V" at 3665,7425 h50 r180
  text "S4" at 3045,7420 h50 r180
  text "10V" at 4470,7415 h50 r180
  text "GND" at 4680,7415 h50 r180
  text "S2" at 4860,7415 h50 r180
  text "S4" at 5055,7415 h50 r180
  text "S4" at 585,5050 h50 r270
  text "S3" at 505,4955 h50 r270
  text "S4" at 7415,4955 h50 r90
  text "S3" at 7490,4865 h50 r90
  text "S2" at 585,4855 h50 r270
  text "S2" at 7420,4755 h50 r90
  text "S1" at 505,4745 h50 r270
  text "S1" at 7495,4680 h50 r90
  text "GND" at 585,4675 h50 r270
  text "5V" at 505,4545 h50 r270
  text "GND" at 7420,4535 h50 r90
  text "10V" at 585,4465 h50 r270
  text "5V" at 7495,4460 h50 r90
  text "28V" at 510,4360 h50 r270
  text "10V" at 7420,4335 h50 r90
  text "28V" at 7495,4230 h50 r90
  text "28V" at 505,3770 h50 r270
  text "10V" at 580,3665 h50 r270
  text "28V" at 7490,3650 h50 r90
  text "10V" at 7415,3545 h50 r90
  text "5V" at 505,3540 h50 r270
  text "GND" at 580,3465 h50 r270
  text "5V" at 7495,3465 h50 r90
  text "GND" at 7415,3335 h50 r90
  text "S1" at 505,3320 h50 r270
  text "S1" at 7495,3265 h50 r90
  text "S2" at 580,3245 h50 r270
  text "S2" at 7415,3155 h50 r90
  text "S3" at 510,3135 h50 r270
  text "S3" at 7495,3055 h50 r90
  text "S4" at 585,3045 h50 r270
  text "S4" at 7415,2960 h50 r90
  text "S4" at 2950,585 h50
  text "S2" at 3145,585 h50
  text "GND" at 3325,585 h50
  text "10V" at 3535,585 h50
  text "S4" at 4960,585 h50
  text "10V" at 4340,580 h50
  text "GND" at 4540,580 h50
  text "S2" at 4760,580 h50
  text "28V" at 3640,510 h50
  text "S3" at 4870,510 h50
  text "S3" at 3045,505 h50
  text "S1" at 3255,505 h50
  text "5V" at 3455,505 h50
  text "28V" at 4235,505 h50
  text "5V" at 4465,505 h50
  text "S1" at 4685,505 h50
  text "PHASE 4" at 7265,235 h80
  text "PHASE 2" at 403,218 h80

## Text inside footprints (layer, text, board x,y; h text height)
D1_1: Top Overlay "*" at 824,6343 h20 r180; Mechanical 13 "*" at 828.5,6290 h50 r180
D1_2: Top Overlay "*" at 849,1758 h20 r180; Mechanical 13 "*" at 843.5,1710 h50 r180
D1_3: Top Overlay "*" at 7153,6238 h20; Mechanical 13 "*" at 7151.5,6290 h50
D1_4: Top Overlay "*" at 7148,1656 h20; Mechanical 13 "*" at 7166.5,1710 h50
U1_1: Top Overlay "*" at 1067.08,7090.75 h50 r270; Mechanical 13 "*" at 1037.06,7019.26 h50 r270
U1_2: Top Overlay "*" at 942.92,914.25 h50 r90; Mechanical 13 "*" at 972.94,985.74 h50 r90
U1_3: Top Overlay "*" at 7057.08,7085.75 h50 r270; Mechanical 13 "*" at 7027.06,7014.26 h50 r270
U1_4: Top Overlay "*" at 6932.92,909.25 h50 r90; Mechanical 13 "*" at 6962.94,980.74 h50 r90